# EAGLE board 612_jetracer (EAGLE 9.5.1)
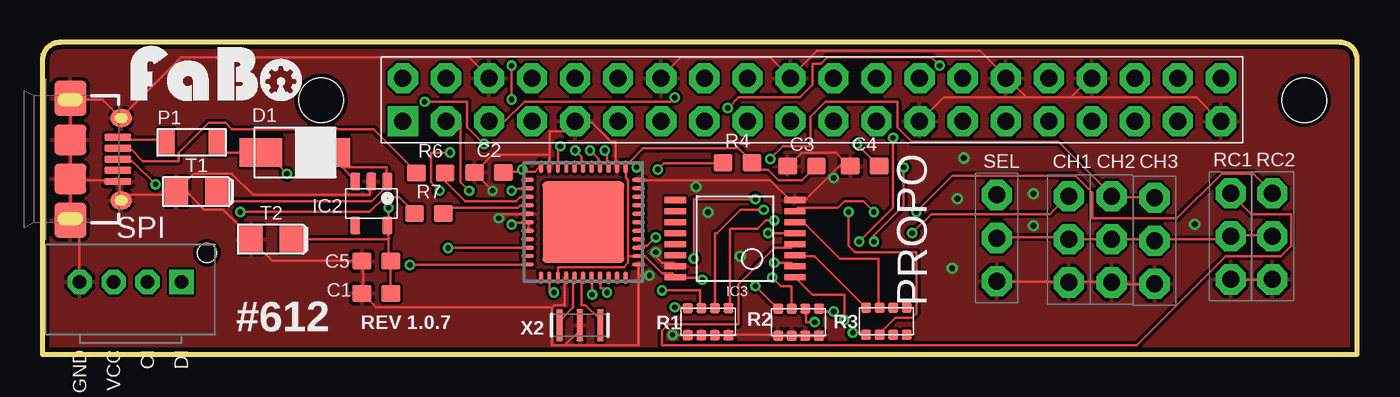
[diagram p0: board, top side]
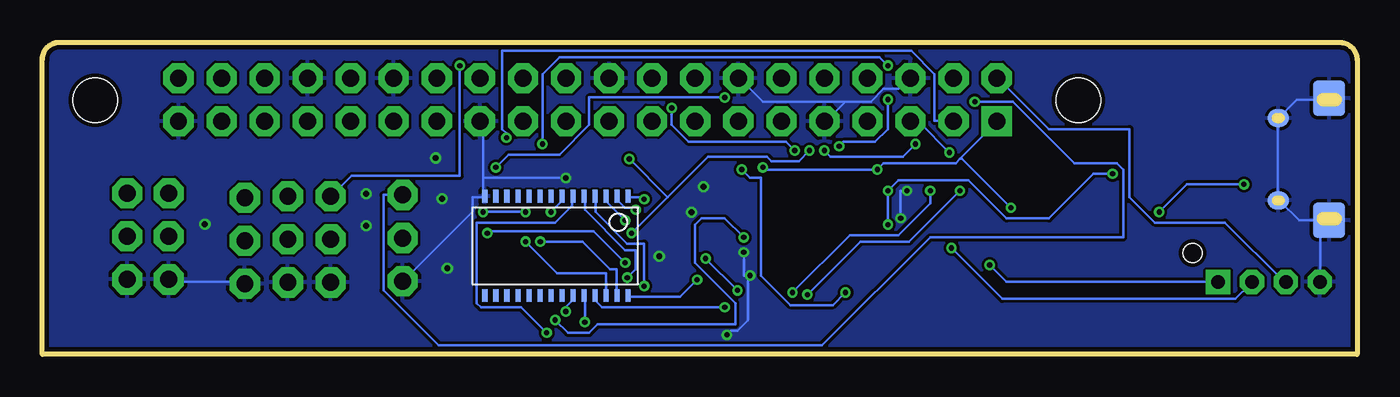
[diagram p1: board, bottom side, seen from below]

Size 77.55 x 18.39 mm. Coordinates in mm from the lower left corner, seen from the top.
Outline: 0,17.39 0,0 77.55,0 77.55,17.39 arc90 76.55,18.39 1.07,18.39 arc90 0,17.39
Copper layers (1*16): Top 0.035mm / dielectric 1.6mm / Bottom 0.035mm
Design rules "PCBway": minimum track width 6mil, minimum drill 12mil, track to track 6mil, track to pad 6mil, pad to pad 6mil, via to via 6mil, smd to smd 6mil, copper to edge 10mil, drill to drill 10mil, minimum pad ring 10mil, minimum via ring 6mil, stop-mask expansion 2mil, vias tented up to drill 100mil, thermal gap 8mil
Net classes: 2 gnd: width 0.254 mm, drill 0.61 mm, clearance 0.254 mm; 3 usbvcc: width 0.254 mm, drill 0.61 mm, clearance 0.254 mm; 4 aref: width 0.254 mm, drill 0.61 mm, clearance 0.254 mm
Holes 2.6 mm at 16.45,14.99 74.43,14.99

## Footprints (pad centres in the part's own frame; a part is rotated, then mirrored left to right if it is on the bottom)
0603 = smd 1.1 x 1: 1 -0.85,0; 2 0.85,0
FABO_BRICK_3PIN_HEADER = drill 1 pad 1.778 octagon: GND -2.54,0; I/O 2.54,0; VCC 0,0
B320A = smd 2.5 x 1.7: ANODE -2,0; CATHODE 2,0
SOT-23-5 = smd 0.6 x 1.05: 1 -0.95,-1.3; 2 0,-1.3; 3 0.95,-1.3; 4 0.95,1.3; 5 -0.95,1.3
TSSOP-16 = smd 0.36 x 1.26: 1 -2.275,-3.53; 2 -1.625,-3.53; 3 -0.975,-3.53; 4 -0.325,-3.53; 5 0.325,-3.53; 6 0.975,-3.53; 7 1.625,-3.53; 8 2.275,-3.53; 9 2.275,3.53; 10 1.625,3.53; 11 0.975,3.53; 12 0.325,3.53; 13 -0.325,3.53; 14 -0.975,3.53; 15 -1.625,3.53; 16 -2.275,3.53
1206 = smd 1 x 1.6: P$1 -1.5,0; P$2 1.5,0
EXBV8V = smd 0.6 x 0.6: 1 -1.2,-0.8; 2 -0.4,-0.8; 3 0.4,-0.8; 4 1.2,-0.8; 5 1.2,0.8; 6 0.4,0.8; 7 -0.4,0.8; 8 -1.2,0.8
SPI-B04B-PASK-1 = drill 0.8 pad 1.422 octagon: CI 1,1.27; GND -3,1.27; VCC -1,1.27 | drill 0.8 pad 1.422 square: DI 3,1.27 | hole 1.1: 4.5,2.97
1206-TANTULM = smd 1.4 x 1.6: + 1.2,0; - -1.2,0
QFN44ML7X7 = smd 0.75 x 0.275: 1 -3.275,2.5; 2 -3.275,2; 3 -3.275,1.5; 4 -3.275,1; 5 -3.275,0.5; 6 -3.275,0; 7 -3.275,-0.5; 8 -3.275,-1; 9 -3.275,-1.5; 10 -3.275,-2; 11 -3.275,-2.5; 23 3.275,-2.5; 24 3.275,-2; 25 3.275,-1.5; 26 3.275,-1; 27 3.275,-0.5; 28 3.275,0; 29 3.275,0.5; 30 3.275,1; 31 3.275,1.5; 32 3.275,2; 33 3.275,2.5 | smd 0.275 x 0.75: 12 -2.5,-3.275; 13 -2,-3.275; 14 -1.5,-3.275; 15 -1,-3.275; 16 -0.5,-3.275; 17 0,-3.275; 18 0.5,-3.275; 19 1,-3.275; 20 1.5,-3.275; 21 2,-3.275; 22 2.5,-3.275; 34 2.5,3.275; 35 2,3.275; 36 1.5,3.275; 37 1,3.275; 38 0.5,3.275; 39 0,3.275; 40 -0.5,3.275; 41 -1,3.275; 42 -1.5,3.275; 43 -2,3.275; 44 -2.5,3.275 | smd 4.826 x 4.826: EXP 0,0
JETSON_NANO_NOBOARDER = drill 1 pad 1.778 square: 1 1.27,1.27 | drill 1 pad 1.778 octagon: 2 1.27,3.81; 3 3.81,1.27; 4 3.81,3.81; 5 6.35,1.27; 6 6.35,3.81; 7 8.89,1.27; 8 8.89,3.81; 9 11.43,1.27; 10 11.43,3.81; 11 13.97,1.27; 12 13.97,3.81; 13 16.51,1.27; 14 16.51,3.81; 15 19.05,1.27; 16 19.05,3.81; 17 21.59,1.27; 18 21.59,3.81; 19 24.13,1.27; 20 24.13,3.81; 21 26.67,1.27; 22 26.67,3.81; 23 29.21,1.27; 24 29.21,3.81; 25 31.75,1.27; 26 31.75,3.81; 27 34.29,1.27; 28 34.29,3.81; 29 36.83,1.27; 30 36.83,3.81; 31 39.37,1.27; 32 39.37,3.81; 33 41.91,1.27; 34 41.91,3.81; 35 44.45,1.27; 36 44.45,3.81; 37 46.99,1.27; 38 46.99,3.81; 39 49.53,1.27; 40 49.53,3.81
PCA9685_BOTTOM = smd 0.3 x 0.75 bottom: 1 4.3,-2.93; 2 3.65,-2.93; 3 3,-2.93; 4 2.35,-2.93; 5 1.7,-2.93; 6 1.05,-2.93; 7 0.4,-2.93; 8 -0.25,-2.93; 9 -0.9,-2.93; 10 -1.55,-2.93; 11 -2.2,-2.93; 12 -2.85,-2.93; 13 -3.5,-2.93; 14 -4.15,-2.93; 15 -4.15,2.92; 16 -3.5,2.92; 17 -2.85,2.92; 18 -2.2,2.92; 19 -1.55,2.92; 20 -0.9,2.92; 21 -0.25,2.92; 22 0.4,2.92; 23 1.05,2.92; 24 1.7,2.92; 25 2.35,2.92; 26 3,2.92; 27 3.65,2.92; 28 4.3,2.92
ZX62D-B-5PA8 = smd 0.4 x 1.6: 1 -1.3,4.25; 2 -0.65,4.25; 3 0,4.25; 4 0.65,4.25; 5 1.3,4.25 | smd 1.05 x 1.25 bottom: B1 -2.425,4.45; B2 2.425,4.45 | smd 2.1 x 1.9 bottom: B3 -3.6,1.45; B4 3.6,1.45 | smd 1.05 x 1.25: T1 -2.425,4.45; T2 2.425,4.45 | smd 2.1 x 1.9: T3 -3.6,1.45; T6 3.6,1.45 | smd 1.8 x 1.9: T4 -1.15,1.45; T5 1.15,1.45
CSTNE_V_C = smd 0.4 x 1.9: 1 1.2,0; 2 0,0; 3 -1.2,0

## Placement (x,y rotation side)
C1  1uF  [0603]  19.7,3.6 0 top
C2  0.1uF  [0603]  26.34,10.73 0 top
C3  0.1uF  [0603]  44.81,11.1 0 top
C4  1uF  [0603]  48.5,11.1 0 top
C5  0.1uF  [0603]  19.7,5.5 0 top
CH1  [FABO_BRICK_3PIN_HEADER]  60.53,6.78 90 top
CH2  [FABO_BRICK_3PIN_HEADER]  63.06,6.78 90 top
CH3  [FABO_BRICK_3PIN_HEADER]  65.6,6.7 90 top
D1  SCHOTTKY_DIODE_B320A  [B320A]  14.9,11.9 180 top
IC2  [SOT-23-5]  19.4,8.9 180 top
IC3  MULTIPLEXERSMC74HC157A  [TSSOP-16]  40.85,6.83 90 top
P1  MF-NSML600-2  [1206]  8.8,12.5 0 top
R1  10k  [EXBV8V]  39.27,1.93 0 top
R2  10k  [EXBV8V]  44.6,1.9 0 top
R3  220  [EXBV8V]  49.78,1.96 0 top
R4  10k  [0603]  41,11.3 0 top
R6  22  [0603]  22.9,10.7 0 top
R7  22  [0603]  22.8,8.3 0 top
RC1  [FABO_BRICK_3PIN_HEADER]  70.09,6.96 90 top
RC2  [FABO_BRICK_3PIN_HEADER]  72.55,6.96 90 top
SEL  [FABO_BRICK_3PIN_HEADER]  56.29,6.86 90 top
SPI  FABO-SPI-LED-B04B  [SPI-B04B-PASK-1]  5.2,3 0 top
T1  10uF  [1206-TANTULM]  9.1,9.6 0 top
T2  10uF  [1206-TANTULM]  13.5,6.8 0 top
U1  ATMEGA32U4-XUMU  [QFN44ML7X7]  31.9,7.8 0 top
U$2  JETSON_NANO_NOBORDER  [JETSON_NANO_NOBOARDER]  19.99,12.48 0 top
U$4  PCA9685_BOTTOM  [PCA9685_BOTTOM]  47.3,6.4 180 top
U$14  [LOGO_FABO_MS]  10.26,14.57 0 top
VM_CN  [ZX62D-B-5PA8]  0.2,11.5 270 top
X2  16MHz  [CSTNE_V_C]  31.7,1.71 180 top

## Library data of the parts
C1-C5 T1 T2 = FaBo-Capacitor
CH1-CH3 RC1 RC2 SEL = FaBo-Template
D1 = FaBo-Diode
IC2 P1 = FaBo-Supply
IC3 = FaBo-Multiplexers
R1-R3 VM_CN X2 = component
R4 R6 R7 = FaBo-Resistors
SPI = FaBo-Connetor
U1 = SmartPrj
U$2 = FaBo-Boards
U$4 = FaBo-Motor
U$14 = FaBo-etc

## Nets
3V3: C1.2 C2.2 C3.2 C5.2 IC2.5 IC3.16 R4.2 T2.+ U1.14 U1.24 U1.34 U1.44 U$2.1 U$4.28
5V: SPI.VCC U$2.2
A4: U1.40
A5: U1.41
AVDD: D1.CATHODE P1.P$2 U1.2 U1.6 U1.7
CE0: U$2.24
D4: IC3.1 U1.25
D5: U1.26
D6: U1.27
D7: U1.1
D+: R7.2 U1.4
D-: R6.2 U1.3
GND: C1.1 C2.1 C3.1 C4.1 C5.1 CH1.GND CH2.GND CH3.GND IC2.2 IC3.8 IC3.15 R1.1 R1.2 R1.3 R1.4 R2.1 R2.2 R2.3 R2.4 RC1.GND RC2.GND SEL.GND SPI.GND T1.- T2.- U1.5 U1.15 U1.23 U1.33 U1.35 U1.43 U$2.6 U$2.9 U$2.14 U$2.20 U$2.25 U$2.30 U$2.34 U$2.39 U$4.14 VM_CN.5 VM_CN.B1 VM_CN.B2 VM_CN.B3 VM_CN.B4 VM_CN.T1 VM_CN.T2 VM_CN.T3 VM_CN.T4 VM_CN.T5 VM_CN.T6 X2.2
GPIO4: U$2.7
GPIO5: U$2.29
GPIO6: U$2.31
GPIO12: U$2.32
GPIO13: U$2.33
GPIO16: U$2.36
GPIO17: U$2.11
GPIO18: U$2.12
GPIO19: U$2.35
GPIO20: U$2.38
GPIO21: U$2.40
GPIO22: U$2.15
GPIO23: U$2.16
GPIO24: U$2.18
GPIO25: U$2.22
GPIO26: U$2.37
GPIO27: U$2.13
MISO: U1.10
MOSI: SPI.DI U1.11
N$2: R3.1 U$4.6
N$3: R3.2 U$4.7
N$4: C4.2 U1.42
N$5: U1.16 X2.1
N$6: R6.1 VM_CN.2
N$7: R2.5 U$4.23
N$8: R1.8 U$4.25
N$9: R1.7 U$4.1
N$10: R1.6 U$4.2
N$11: R1.5 U$4.3
N$12: R2.8 U$4.4
N$13: R2.7 U$4.5
N$14: U1.17 X2.3
N$16: R4.1 U1.13
N$17: R7.1 VM_CN.3
N$18: D1.ANODE IC2.1 IC2.3 T1.+
N$19: R2.6 U$4.24
PAD: U1.EXP
PCH1: CH1.I/O IC3.2 U1.36
PCH2: CH2.I/O CH3.I/O IC3.5 U1.37
PCH3: U1.38
PTCP1: P1.P$1 VM_CN.1
PWM0: IC3.3 R3.8
PWM1: IC3.6 R3.7
RCH1: IC3.4 RC1.I/O
RCH2: IC3.7 RC2.I/O
RX: U$2.10
SCK: SPI.CI U1.9
SCL: U1.18 U$2.5 U$4.26
SDA: U1.19 U$2.3 U$4.27
SEL: SEL.I/O U1.39
TX: U$2.8
VCC: CH1.VCC CH2.VCC CH3.VCC RC1.VCC RC2.VCC SEL.VCC

## Tracks (layer width: path | path; a pad name or v marks a point on that pad's centre or on a via)
3V3  (via drill 0.3)
  Top 0.152: v38.92,4.4 38.8,4.53 37.42,4.53 IC3.16 37.3,4.65 37.17,4.78 36.55,4.78 35.55,5.78 35.17,5.78 | C3.2 45.55,11.03 44.8,10.28 43.42,10.28 42.8,10.9 42.3,10.9 41.92,11.28 R4.2 41.8,11.4 41.05,12.15 35.42,12.15 34.67,11.4 | 34.55,5.78 34.55,5.4 34.3,5.15 30.43,5.15 30.43,4.53 U1.14 | 35.17,5.78 34.55,5.78 | 34.55,5.78 34.55,10.28 34.42,10.4 34.42,11.03 U1.34 34.42,11.15 34.67,11.4 | 35.17,5.78 U1.24 | 20.43,6.78 20.43,5.53 20.55,5.53 C5.2 C1.2 | 20.43,6.78 20.43,7.53 IC2.5 20.43,7.65 v20.43,8.65 | 20.43,6.78 14.8,6.78 T2.+ | 28.3,10.78 27.3,10.78 C2.2 | 28.3,10.78 29.05,10.78 29.3,11.03 U1.44 | v28.3,10.9 28.3,10.78 | v35.05,11.03 34.67,11.4
  Bottom 0.152: v38.92,4.4 39.92,3.4 42.92,3.4 U$4.28 | 23.43,11.53 21.3,13.65 U$2.1 | 23.43,11.53 23.68,11.28 27.93,11.28 v28.3,10.9 34.92,10.9 v35.05,11.03 | v20.43,8.65 23.3,11.53 23.43,11.53
5V
  Bottom 0.152: SPI.VCC 4.3,4.28 7.8,7.78 11.93,7.78 13.43,9.28 13.43,13.28 18.18,13.28 21.18,16.27 U$2.2
AVDD  (via drill 0.3)
  Top 0.152: U1.7 28.68,7.4 28.68,7.78 U1.6 28.55,7.78 27.8,7.78 v27.68,7.65 | v27.68,9.65 27.8,9.78 28.55,9.78 U1.2 | P1.P$2 10.3,12.4 10.8,11.9 D1.CATHODE 13.18,11.9 v14.43,10.65
  Bottom 0.152: v27.68,7.65 v27.68,9.65 27.05,10.28 22.93,10.28 20.68,8.03 18.18,8.03 15.55,10.65 v14.43,10.65
D4  (via drill 0.3)
  Top 0.152: v36.17,6.9 35.67,6.4 35.17,6.4 U1.25 | v47.3,2.02 47.3,3.52 45.42,3.52 44.42,4.53 IC3.1
  Bottom 0.152: v36.17,6.9 37.3,8.03 38.67,8.03 39.05,7.65 39.05,5.4 36.67,3.02 36.67,1.77 44.8,1.77 45.3,1.27 46.55,1.27 v47.3,2.02
D+
  Top 0.152: U1.4 28.55,8.78 28.18,8.78 28.05,8.65 23.93,8.65 23.68,8.4 R7.2
D-
  Top 0.152: U1.3 28.55,9.28 28.18,9.28 27.93,9.03 24.93,9.03 23.8,10.15 23.8,10.65 R6.2
GND  (via drill 0.3, 0.35)
  Top 0.152: R2.4 45.8,1.15 45.05,1.15 R2.3 44.92,1.15 44.3,1.15 R2.2 44.17,1.15 43.42,1.15 R2.1 43.3,1.15 40.55,1.15 R1.4 40.42,1.15 39.67,1.15 R1.3 39.55,1.15 38.92,1.15 R1.2 38.8,1.15 38.17,1.15 R1.1 38.05,1.15 v37.17,1.15 | 30.05,2.77 30.18,2.9 30.8,2.9 30.8,4.53 U1.15 | 30.05,2.77 30.05,0.53 30.8,0.53 | 30.8,0.53 31.68,1.4 31.68,1.65 X2.2 | 35.17,4.65 35.17,0.53 30.8,0.53 | 35.17,4.65 U1.23 | v36.17,6.03 36.17,5.78 36.55,5.4 37.17,5.4 37.3,5.28 IC3.15 | 35.17,4.65 v35.8,4.65 | 1.68,15.03 3.55,15.03 VM_CN.B1 4.67,14.03 8.18,17.52 25.18,17.52 26.3,16.4 U$2.6 | 1.68,10.28 4.42,10.28 VM_CN.5 4.55,10.15 4.55,9.15 VM_CN.T2 4.67,9.15 4.92,9.4 8.68,9.4 | 1.68,12.65 1.68,10.4 VM_CN.T5 1.68,10.28 | 1.68,10.28 1.68,7.9 | 1.68,12.65 1.68,15.03 | 1.68,15.03 VM_CN.B3 | 1.68,12.65 VM_CN.T4 | 8.18,9.9 7.92,9.65 T1.- 8.18,9.9 | 8.18,9.9 8.93,10.65 11.18,10.65 12.43,9.4 19.3,9.4 19.3,10.15 IC2.2 | 8.18,9.9 8.68,9.4 | 8.68,9.4 9.55,8.53 10.68,8.53 12.3,6.9 T2.- 12.3,6.78 13.55,5.53 18.8,5.53 C5.1 18.93,5.4 18.93,3.65 C1.1 19.68,2.77 30.05,2.77 | 1.68,7.9 2.17,7.9 2.17,4.28 SPI.GND | 1.68,7.9 VM_CN.T6 | v26.93,8.03 27.18,8.28 28.55,8.28 U1.5 | v26.55,9.65 25.55,10.65 C2.1 25.55,10.78 26.55,11.78 29.93,11.78 | 29.93,11.78 29.93,13.15 30.8,13.15 31.3,13.65 U$2.9 31.43,13.65 32.42,13.65 33.55,12.53 33.8,12.53 33.8,11.15 U1.35 | 29.93,11.78 29.93,11.15 U1.43 | U$2.14 36.55,16.4 37.67,17.52 42.92,17.52 44.05,16.4 U$2.20 44.17,16.4 45.67,17.9 55.3,17.9 56.8,16.4 U$2.30 56.92,16.27 58.05,15.15 | SEL.GND 56.3,4.28 60.42,4.28 CH1.GND 60.55,4.28 63.05,4.28 CH2.GND 63.17,4.15 65.55,4.15 CH3.GND
  Top 0.152: RC1.GND 70.17,4.4 72.55,4.4 RC2.GND | 47.3,11.4 47.55,11.15 C4.1 47.3,11.4 | 47.3,11.4 46.8,11.9 44.8,11.9 44.05,11.15 C3.1 | U1.33 35.17,10.28 42.92,10.28 44.05,9.15 44.3,9.15 IC3.8 44.42,9.15 45.05,9.15 46.42,10.53 | 46.42,10.53 47.3,11.4 | 60.67,15.15 58.05,15.15 | 60.67,15.15 61.8,16.27 U$2.34 | 60.67,15.15 68.05,15.15 69.42,13.78 U$2.39 | 58.05,15.15 53.17,15.15 51.8,13.78 U$2.25 | 46.42,10.53 46.55,10.4 v46.67,10.4
  Bottom 0.152: v36.17,6.03 36.17,4.65 35.92,4.65 | v37.17,1.15 36.92,1.4 36.55,1.4 35.92,2.02 35.92,4.65 | 35.92,4.65 v35.8,4.65 | VM_CN.B3 1.68,15.03 3.55,15.03 VM_CN.B1 4.67,13.9 4.67,9.15 VM_CN.T2 4.55,9.03 3.42,7.9 2.17,7.9 | 2.17,7.9 VM_CN.T6 1.68,7.9 | 2.17,7.9 2.17,4.28 SPI.GND | v26.93,8.03 26.93,9.65 v26.55,9.65 | 30.18,14.9 28.68,14.9 27.93,15.65 27.05,15.65 26.43,16.27 U$2.6 | 30.18,14.9 31.3,13.78 U$2.9 | 30.18,14.9 35.05,14.9 36.42,16.27 U$2.14 | RC1.GND 70.05,4.4 69.92,4.28 65.67,4.28 CH3.GND | 51.55,10.4 51.55,13.65 51.67,13.65 U$2.25 | 51.55,10.4 51.55,9.4 U$4.14 51.55,9.28 52.17,9.28 52.17,8.4 56.17,4.4 SEL.GND | 51.55,10.4 v46.67,10.4
  other vias: 53.66,5.08 39.26,8.38 41.16,5.78 38.56,9.88 53.96,9.18 54.36,11.58 58.46,9.48 58.46,7.58 67.96,7.68
  pour Top: -0.2,-0.1 78.54,-0.1 78.54,18.95 77.27,18.95 -0.2,18.95
  pour Bottom: -0.2,-0.1 78.54,-0.1 78.54,18.95 -0.2,18.95
MOSI  (via drill 0.3)
  Top 0.152: v21.68,5.28 28.55,5.28 U1.11
  Bottom 0.152: v21.68,5.28 20.68,4.28 8.3,4.28 SPI.DI
N$2  (via drill 0.3)
  Top 0.152: v47.8,1.27 48.55,1.27 R3.1
  Bottom 0.152: v47.8,1.27 49.3,2.77 51.67,2.77 51.92,3.02 51.92,7.78 47.3,7.78 46.3,8.78 46.3,9.28 U$4.6
N$3  (via drill 0.3)
  Top 0.152: v47.55,8.4 47.55,6.4 47.92,6.03 51.55,6.03 51.55,2.4 51.3,2.15 50.3,2.15 49.42,1.27 R3.2
  Bottom 0.152: v47.55,8.4 46.92,9.03 46.92,9.28 U$4.7
N$4  (via drill 0.3)
  Top 0.152: v30.55,12.28 30.43,12.28 30.43,11.15 U1.42 | v27.68,17.02 v27.68,15.03 | C4.2 v48.05,12.4
  Bottom 0.152: v30.55,12.28 30.3,12.53 28.43,12.53 27.68,13.28 v27.68,15.03 | v27.68,17.02 28.18,17.52 47.05,17.52 48.05,16.52 v48.05,12.4
N$5
  Top 0.152: U1.16 31.3,4.53 31.3,2.77 30.55,2.02 30.55,1.77 X2.1
N$6
  Top 0.152: VM_CN.2 5.17,12.15 5.92,11.4 8.05,11.4 8.05,11.9 9.8,13.65 10.8,13.65 11.18,13.28 19.55,13.28 22.05,10.78 R6.1
N$7  (via drill 0.3)
  Top 0.152: v46.67,2.52 45.92,2.52 45.8,2.65 R2.5
  Bottom 0.152: v46.67,2.52 46.67,2.77 46.3,3.15 46.3,3.4 U$4.23
N$8  (via drill 0.3)
  Top 0.152: v37.3,2.77 38.05,2.77 R1.8
  Bottom 0.152: v37.3,2.77 44.55,2.77 44.92,3.15 44.92,3.4 U$4.25
N$9  (via drill 0.3)
  Top 0.152: v36.55,3.77 38.8,3.77 38.8,2.77 R1.7 | v38.42,5.65 38.42,9.15 v42.05,9.15
  Bottom 0.152: v38.42,5.65 v36.55,3.77 | v42.05,9.15 42.17,9.28 42.92,9.28 U$4.1
N$10  (via drill 0.3)
  Top 0.152: v42.55,8.53 41.17,8.53 39.8,7.15 39.67,7.15 39.67,2.77 R1.6
  Bottom 0.152: v42.55,8.53 42.67,8.65 43.17,8.65 43.55,9.03 43.55,9.28 U$4.2
N$11  (via drill 0.3)
  Top 0.152: v43.17,7.9 42.67,7.9 42.17,7.4 40.55,7.4 40.55,2.77 R1.5
  Bottom 0.152: v43.17,7.9 44.3,9.03 U$4.3
N$12  (via drill 0.3)
  Top 0.152: v42.05,4.03 43.3,2.77 R2.8
  Bottom 0.152: v42.05,4.03 42.05,6.53 43.05,6.53 44.92,8.4 44.92,9.28 U$4.4
N$13  (via drill 0.3)
  Top 0.152: v43.05,4.53 43.55,4.03 44.17,4.03 44.17,2.77 R2.7
  Bottom 0.152: v43.05,4.53 42.55,5.03 42.55,6.15 43.17,6.15 45.55,8.53 45.55,9.28 U$4.5
N$14
  Top 0.152: U1.17 31.8,4.53 31.8,2.9 32.05,2.9 32.8,2.15 32.8,1.77 X2.3
N$16  (via drill 0.3)
  Top 0.152: v30.18,3.65 29.93,3.65 29.93,4.53 U1.13 | v36.3,10.9 36.67,11.28 40.05,11.28 R4.1
  Bottom 0.152: v30.18,3.65 30.93,2.9 33.42,2.9 35.17,4.65 35.17,10.4 35.8,10.4 v36.3,10.9
N$17  (via drill 0.3)
  Top 0.152: v11.68,8.4 19.3,8.4 20.18,9.28 21.05,9.28 21.93,8.4 R7.1 | v6.67,10.03 5.3,11.4 4.55,11.4 VM_CN.3
  Bottom 0.152: v11.68,8.4 10.05,10.03 v6.67,10.03
N$18
  Top 0.152: 17.68,11.03 16.8,11.9 D1.ANODE | 17.68,11.03 18.43,10.28 IC2.3 | 17.68,11.03 20.3,11.03 20.3,10.28 IC2.1 20.3,10.15 20.3,9.9 19.43,9.03 10.8,9.03 10.3,9.53 T1.+
N$19  (via drill 0.3)
  Top 0.152: v45.55,1.9 45.05,1.9 45.05,2.65 R2.6
  Bottom 0.152: v45.55,1.9 45.55,3.4 U$4.24
PCH1  (via drill 0.3)
  Top 0.152: v33.17,12.03 33.3,12.03 33.3,11.15 U1.36 | v40.42,14.53 41.05,15.15 44.67,15.15 45.42,15.9 45.42,17.15 45.92,17.15 46.3,17.52 52.42,17.52 v52.92,17.02 | v43.17,5.4 44.17,5.4 44.3,5.28 IC3.2 | v51.3,7.15 52.42,8.28 59.42,8.28 60.42,9.28 CH1.I/O
  Bottom 0.152: v33.17,12.03 33.67,12.53 39.42,12.53 40.42,13.53 v40.42,14.53 | v52.92,17.02 52.92,10.53 59.3,10.53 60.42,9.4 CH1.I/O | v43.17,5.4 45.05,7.28 51.17,7.28 v51.3,7.15
PCH2  (via drill 0.3)
  Top 0.152: CH3.I/O 65.55,9.28 63.17,9.28 CH2.I/O 63.05,9.4 59.92,12.53 51.3,12.53 50.42,13.4 50.42,14.9 46.17,14.9 45.3,14.03 45.3,12.28 43.67,12.28 v42.92,11.53 | v32.3,12.03 32.8,11.53 32.8,11.15 U1.37 | IC3.5 v42.8,7.15
  Bottom 0.152: v32.3,12.03 32.92,11.4 34.55,11.4 34.8,11.65 38.3,11.65 40.67,9.28 | v42.8,7.15 40.67,9.28 | 40.67,9.28 v42.92,11.53
PTCP1
  Top 0.152: VM_CN.1 4.55,12.78 4.67,12.65 7.17,12.65 7.3,12.53 P1.P$1
PWM0
  Top 0.152: R3.8 48.55,2.77 45.55,5.78 44.42,5.78 IC3.3
PWM1
  Top 0.152: R3.7 49.3,2.77 49.3,5.65 47.05,5.65 44.92,7.78 44.42,7.78 IC3.6
RCH1
  Top 0.152: IC3.4 44.3,6.4 44.17,6.28 43.17,6.28 41.05,4.15 41.05,1.77 36.92,1.77 36.55,1.4 36.55,0.53 64.55,0.53 69.8,5.78 73.05,5.78 73.67,6.4 73.67,8.28 71.3,8.28 70.17,9.4 RC1.I/O
RCH2  (via drill 0.3)
  Top 0.152: v49.05,8.4 48.42,9.03 47.3,9.03 46.92,8.65 44.55,8.65 44.42,8.53 IC3.7 | v51.55,8.4 53.67,10.53 60.92,10.53 61.92,9.53 61.92,8.03 66.92,8.03 69.55,10.65 71.42,10.65 72.55,9.53 RC2.I/O
  Bottom 0.152: v51.55,8.4 v49.05,8.4
SCK  (via drill 0.3)
  Top 0.152: v23.93,6.28 28.55,6.28 U1.9
  Bottom 0.152: v23.93,6.28 20.93,3.27 7.17,3.27 6.3,4.15 SPI.CI
SCL  (via drill 0.3)
  Top 0.152: v49.05,6.65 49.05,7.03 50.8,8.78 v50.8,11.03 | v37.3,15.15 37.05,14.9 28.43,14.9 27.3,13.78 26.43,13.78 U$2.5 | v32.42,3.52 32.42,4.53 U1.18 | v23.43,9.65 22.93,10.15 22.93,11.9 v24.05,11.9
  Bottom 0.152: U$4.26 44.3,4.78 47.17,4.78 v49.05,6.65 | v50.8,11.03 50.05,11.78 47.05,11.78 45.3,13.53 45.3,15.15 v37.3,15.15 | v32.42,3.52 29.3,6.65 26.43,6.65 v23.43,9.65 | v24.05,11.9 25.8,13.65 26.3,13.65 U$2.5
SDA  (via drill 0.3)
  Top 0.152: v48.17,6.65 50.17,8.65 v50.17,12.78 | v33.3,3.65 33.05,3.9 32.92,3.9 32.92,4.53 U1.19 | v25.18,9.65 24.68,10.15 24.68,13.65 23.8,13.65 U$2.3
  Bottom 0.152: v48.17,6.65 45.67,6.65 44.05,5.03 43.67,5.03 43.67,3.52 U$4.27 | v50.17,12.78 50.17,13.03 50.42,13.28 50.42,17.9 26.3,17.9 24.93,16.52 24.93,13.78 23.8,13.78 U$2.3 | v33.3,3.65 29.93,7.03 27.05,7.03 25.18,8.9 v25.18,9.65
SEL  (via drill 0.3)
  Top 0.152: v31.43,12.03 31.8,11.65 31.8,11.15 U1.39 | v26.05,12.4 25.05,13.4 25.05,14.9 v22.55,14.9
  Bottom 0.152: v31.43,12.03 31.05,11.65 26.8,11.65 v26.05,12.4 | v22.55,14.9 20.3,14.9 16.68,11.28 14.18,11.28 13.8,10.9 13.8,6.9 25.18,6.9 31.55,0.53 54.17,0.53 57.42,3.77 57.42,9.4 SEL.I/O
VCC
  Top 0.152: RC2.VCC 72.55,7.03 70.17,7.03 RC1.VCC 70.05,6.9 69.92,6.78 65.67,6.78 CH3.VCC 65.55,6.78 63.17,6.78 CH2.VCC 63.05,6.78 60.55,6.78 CH1.VCC 60.42,6.9 56.3,6.9 SEL.VCC

## Text on the board
tPlace: PROPO | REV 1.0.7 | #612